# Altium PCB 推杆电容板V2.0.PcbDoc
Units mm, origin at the board's own origin, x right, y up, seen from the top; angles counter-clockwise.
Board outline 23.88 x 22.86 mm, 2 copper layers (Top Layer, Bottom Layer); 34 components, 2 nets, 74 pads, 52 vias.
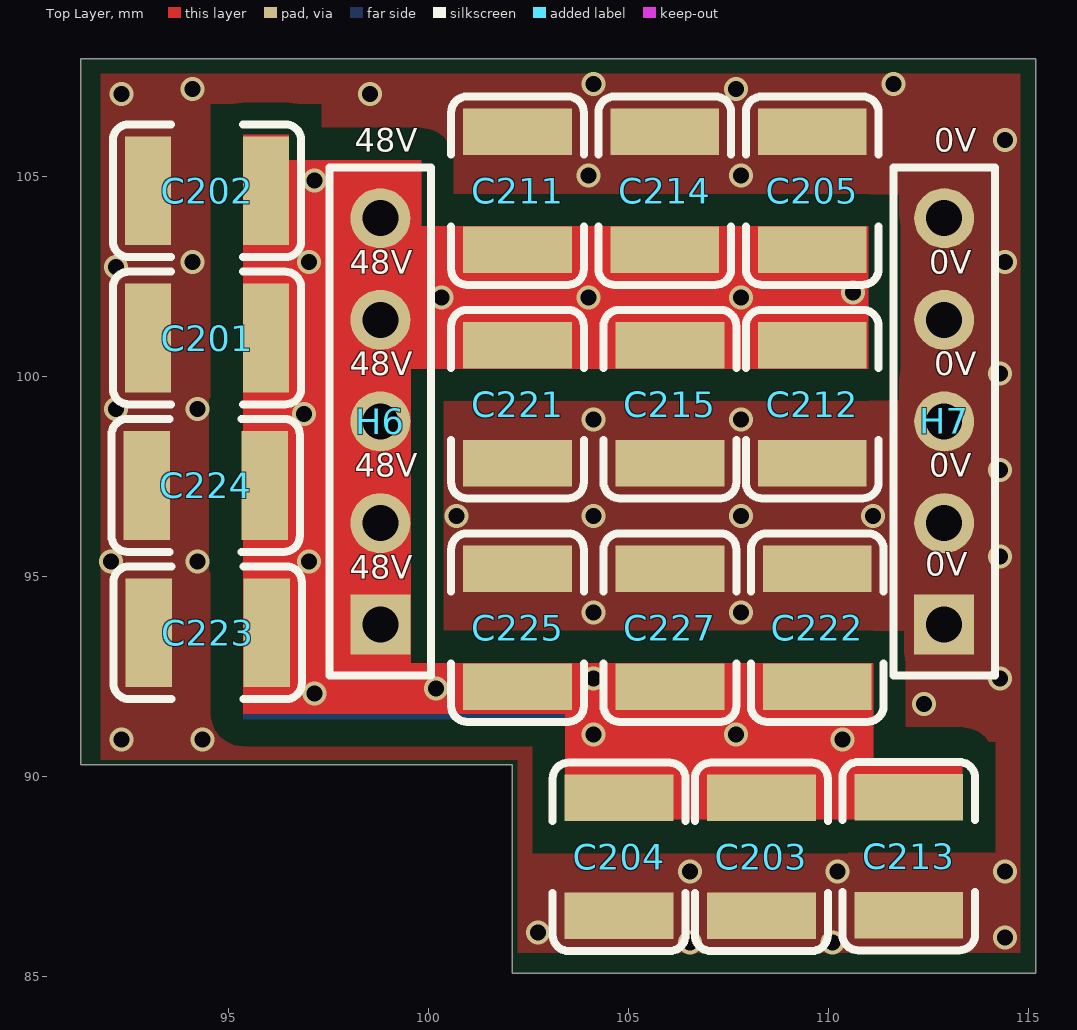
[diagram p0: Top Layer view]
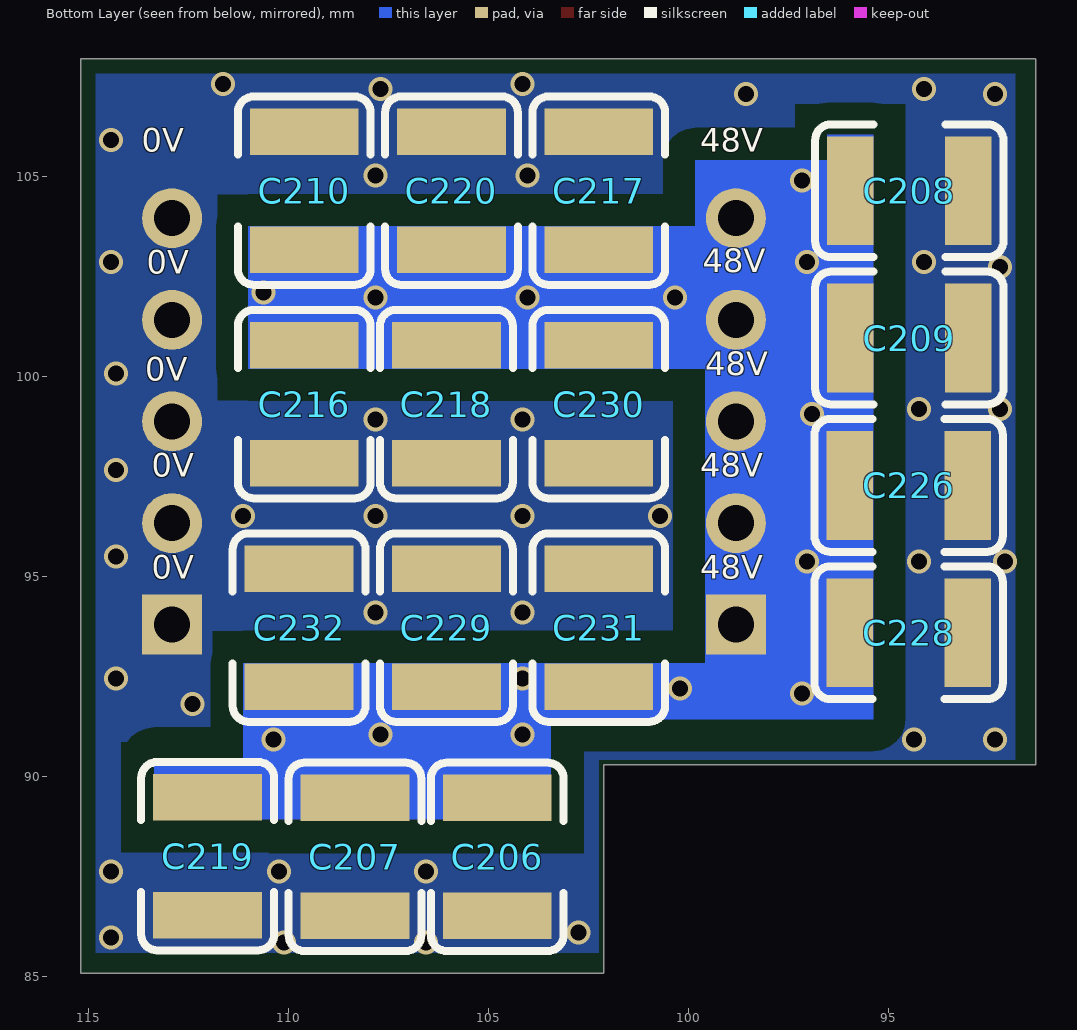
[diagram p1: Bottom Layer view, seen from below]

## Layer stack, top to bottom
Top Solder: solder mask 0.0102, Solder Resist, Dk 3.5
Top Layer: signal copper 0.0356
Dielectric 1: dielectric 0.32, FR-4, Dk 4.8
Bottom Layer: signal copper 0.0356
Bottom Solder: solder mask 0.0102, Solder Resist, Dk 3.5

## Board outline
91.313,90.297 102.108,90.297 102.108,85.09 115.189,85.09 115.189,107.95 91.313,107.95

## Design rules (kind name [scope] priority, off if disabled: settings)
Clearance tssop14 [HasFootprint('TSSOP-14_L5.0-W4.5-P0.65-LS6.4-BL')] p1: gap=0.01 ignorepadtopadclearanceinfootprint=TRUE
Clearance Clearance_1 [All] p2: gap=0.8 ignorepadtopadclearanceinfootprint=FALSE
PlaneConnect [All] p1: planeconnectstyle=Direct reliefexpansion=0.508 reliefentries=4 reliefconductorwidth=0.254 reliefairgap=0.254
PolygonConnect [All] p1: connectstyle=Direct reliefconductorwidth=0.254 reliefentries=4 polygonreliefangle="90 Angle" airgapwidth=0.254
RoutingVias [All] p1: holewidth=0.711 width=1.27 viastyle="Through Hole" minholewidth=0.711 minwidth=1.27 maxholewidth=0.711 maxwidth=1.27
SolderMaskExpansion [All] p1: expansion=0.102 istentingtop=FALSE
SupplyNets "Schematic Supply Nets_3" [InNet('48V')] p1: voltage=0.000
SupplyNets "Schematic Supply Nets_7" [InNet('0V')] p2: voltage=0.000
Width [All] p1: maxlimit=5 minlimit=0.254 preferedwidth=0.254
29 further rules are at their usual default settings.

## Components (designator, comment, footprint, x,y, rotation, side; value= is the part's Value field where it differs from the comment)
C201 "4.7uF" 1210_C 94.473,100.965 r0 top
C202 "4.7uF" 1210_C 94.473,104.648 r0 top
C203 "4.7uF" 1210_C 108.331,87.996 r90 top
C204 "4.7uF" 1210_C 104.775,87.996 r90 top
C205 "4.7uF" 1210_C 109.601,104.648 r270 top
C206 "4.7uF" 1210_C 104.775,87.996 r90 bottom
C207 "4.7uF" 1210_C 108.331,87.996 r90 bottom
C208 "4.7uF" 1210_C 94.473,104.648 r0 bottom
C209 "4.7uF" 1210_C 94.473,100.965 r0 bottom
C210 "4.7uF" 1210_C 109.601,104.648 r270 bottom
C211 "4.7uF" 1210_C 102.235,104.648 r270 top
C212 "4.7uF" 1210_C 109.601,99.314 r90 top
C213 "4.7uF" 1210_C 112.014,88.011 r90 top
C214 "4.7uF" 1210_C 105.918,104.648 r270 top
C215 "4.7uF" 1210_C 106.045,99.314 r90 top
C216 "4.7uF" 1210_C 109.601,99.314 r90 bottom
C217 "4.7uF" 1210_C 102.235,104.648 r270 bottom
C218 "4.7uF" 1210_C 106.045,99.314 r90 bottom
C219 "4.7uF" 1210_C 112.014,88.011 r90 bottom
C220 "4.7uF" 1210_C 105.918,104.648 r270 bottom
C221 "4.7uF" 1210_C 102.235,99.314 r90 top
C222 "4.7uF" 1210_C 109.728,93.726 r270 top
C223 "4.7uF" 1210_C 94.488,93.599 r0 top
C224 "4.7uF" 1210_C 94.439,97.282 r0 top
C225 "4.7uF" 1210_C 102.235,93.726 r270 top
C226 "4.7uF" 1210_C 94.488,97.282 r0 bottom
C227 "4.7uF" 1210_C 106.045,93.726 r270 top
C228 "4.7uF" 1210_C 94.488,93.599 r0 bottom
C229 "4.7uF" 1210_C 106.045,93.726 r270 bottom
C230 "4.7uF" 1210_C 102.235,99.314 r90 bottom
C231 "4.7uF" 1210_C 102.235,93.726 r270 bottom
C232 "4.7uF" 1210_C 109.728,93.726 r270 bottom
H6 "1×5P插针 2.54" HDR1X5 98.806,93.8 r90 top
H7 "1×5P插针 2.54" HDR1X5 112.903,93.8 r90 top

## Footprints (in the part's own frame and the unit in brackets; to place one, negate y for a bottom-side part, rotate by r counter-clockwise, add the part's x,y. Pads: shape width x height; smd on the part's side, far side on the other; paste and mask are expansions set on the pad)
1210_C [mm]
  rect 1.16x2.72 smd: 1(-1.475,0) 2(1.475,0)
  silkscreen extent -2.36,-1.66 2.35,1.66, body extent -1.6,-1.25 1.6,1.25, height 1.3
HDR1X5 [mm] "Connector; Header; 5 Position"
  rect 1.5x1.5 hole 0.9: 1(0,0)
  round 1.5 hole 0.9: 2(2.54,0) 3(5.08,0) 4(7.62,0) 5(10.16,0)
  silkscreen extent -1.27,-1.27 11.43,1.27

## Part data
C201 C202 C203 C204 C205 C206 C207 C208 C209 C210 C211 C212 C213 C214 C215 C216 C217 C218 C219 C220 C221 C222 C223 C224 C225 C226 C227 C228 C229 C230 C231 C232: library part "1210 4.7uf", "100V 4.7uf 1210", JLCPCB Part Class="Extended Part", LCSC Part Name="4.7uF ±10% 100V", Manufacturer=FH(风华), Manufacturer Part=1210B475K101NT, Temperature Coefficient=X7R, Tolerance=±10%, Voltage Rated=100V, Add into BOM=yes, Convert to PCB=yes, Datasheet=https://atta.szlcsc.com/upload/public/pdf/source/20210617/C2840282_5B7AB5BFD77495008CFAB3FC2796A0E9.pdf, Device=1210B475K101NT, Supplier=LCSC, Supplier Footprint=1210, Supplier Part=C2840282, Symbol=1210B475K101NT
H6 H7: library part "Header 5", "Header, 5-Pin", LatestRevisionDate=17-Jul-2002, LatestRevisionNote="Re-released for DXP Platform.", Publisher="Altium Limited"

## Via types
v1: diameter 0.6, hole 0.4, Top Layer to Bottom Layer, tented both sides, 52 vias

## Nets (pads, with @x,y where several pads share a name; then routed paths per layer and width w, separated by ;. In a path a pad name is that pad's centre, name@x,y a point inside that pad or via, vN(x,y) a via of type N, cw(c..) or ccw(c..) an arc to the next point about the centre after c; other vN are vias at no path point)
0V: C201.1 C202.1 C203.1 C204.1 C205.1 C206.1 C207.1 C208.1 C209.1 C210.1 C211.1 C212.1 C213.1 C214.1 C215.1 C216.1 C217.1 C218.1 C219.1 C220.1 C221.1 C222.1 C223.1 C224.1 C225.1 C226.1 C227.1 C228.1 C229.1 C230.1 C231.1 C232.1 H7.1 H7.2 H7.3 H7.4 H7.5
  other v1: 106.553,85.852 110.109,85.852 114.427,85.979 102.743,86.106 106.553,87.63 110.236,87.63 114.427,87.63 92.329,90.932 94.361,90.932 112.395,91.821 114.3,92.456 104.14,94.107 107.823,94.107 92.075,95.377 94.234,95.377 114.3,95.504 100.711,96.52 104.14,96.52 107.823,96.52 111.125,96.52 114.3,97.663 104.14,98.933 107.823,98.933 92.202,99.187 94.234,99.187 114.3,100.076 92.202,102.743 94.107,102.87 114.427,102.87 104.013,105.029 107.823,105.029 114.427,105.918 92.329,107.061 98.552,107.061 94.107,107.188 107.696,107.188 104.14,107.315 111.633,107.315
48V: C201.2 C202.2 C203.2 C204.2 C205.2 C206.2 C207.2 C208.2 C209.2 C210.2 C211.2 C212.2 C213.2 C214.2 C215.2 C216.2 C217.2 C218.2 C219.2 C220.2 C221.2 C222.2 C223.2 C224.2 C225.2 C226.2 C227.2 C228.2 C229.2 C230.2 C231.2 C232.2 H6.1 H6.2 H6.3 H6.4 H6.5
  other v1: 110.363,90.932 104.14,91.059 107.696,91.059 97.155,92.075 100.203,92.202 104.14,92.456 97.028,95.377 96.901,99.06 100.33,101.981 104.013,101.981 107.823,101.981 110.617,102.108 97.028,102.87 97.155,104.902

## Polygon pours and split planes (outlines as drawn)
0V on Bottom Layer "NONET_L-01_P-001" (solid, pour order 0): 91.821,107.569 91.821,90.424 102.235,90.424 102.235,85.598 114.808,85.598 114.808,107.569
0V on Top Layer "NONET_L-01_P-001" (solid, pour order 1): 91.821,107.569 91.821,90.424 102.235,90.424 102.235,85.598 114.808,85.598 114.808,107.569

## Other copper
Top Layer:
  region net 48V: 95.377,106.045 95.377,91.567 103.43,91.567 103.43,88.934 113.351,88.934 113.351,90.424 111.125,90.424 111.125,92.837 99.568,92.837 99.568,100.203 110.998,100.203 110.998,103.759 99.822,103.759 99.822,105.41 96.52,105.41 96.52,106.045
Bottom Layer:
  region net 48V: 95.377,106.045 95.377,91.44 103.43,91.44 103.43,88.934 113.351,88.934 113.351,90.424 111.125,90.424 111.125,92.837 99.568,92.837 99.568,100.203 110.998,100.203 110.998,103.759 99.822,103.759 99.822,105.41 96.52,105.41 96.52,106.045

## Silkscreen, mask and mechanical layers (free items; w line width, h text height)
Top Overlay:
  text "48V" at 98.171,105.42 h1
  text "0V" at 112.649,105.42 h1
  text "48V" at 98.044,102.372 h1
  text "0V" at 112.522,102.372 h1
  text "48V" at 98.044,99.832 h1
  text "0V" at 112.649,99.832 h1
  text "48V" at 98.171,97.292 h1
  text "0V" at 112.522,97.292 h1
  text "0V" at 112.432,94.822 h1
  text "48V" at 98.044,94.752 h1
Bottom Overlay:
  text "48V" at 99.695,105.42 h1
  text "0V" at 113.665,105.42 h1
  text "48V" at 99.64,102.411 h1
  text "0V" at 113.538,102.372 h1
  text "48V" at 99.568,99.832 h1
  text "0V" at 113.573,99.693 h1
  text "48V" at 99.695,97.292 h1
  text "0V" at 113.411,97.292 h1
  text "48V" at 99.695,94.752 h1
  text "0V" at 113.411,94.752 h1
Mechanical 1:
  the board outline again, w0.1